# Altium PCB copper_suicide.PcbDoc (part 3 of 6)
Units mm, origin at the board's own origin, x right, y up, seen from the top; angles counter-clockwise.
Board outline 200 x 200 mm, 10 copper layers (Top Layer, Signal Layer 1, Signal Layer 2, Signal Layer 3, Signal Layer 4, Signal Layer 5, Signal Layer 6, Signal Layer 7, Signal Layer 8, Bottom Layer), stack 1.555 mm thick; 36 components, 3934 nets, 1640 pads, 0 vias.
Unrouted connection lines stored in the file: 671.
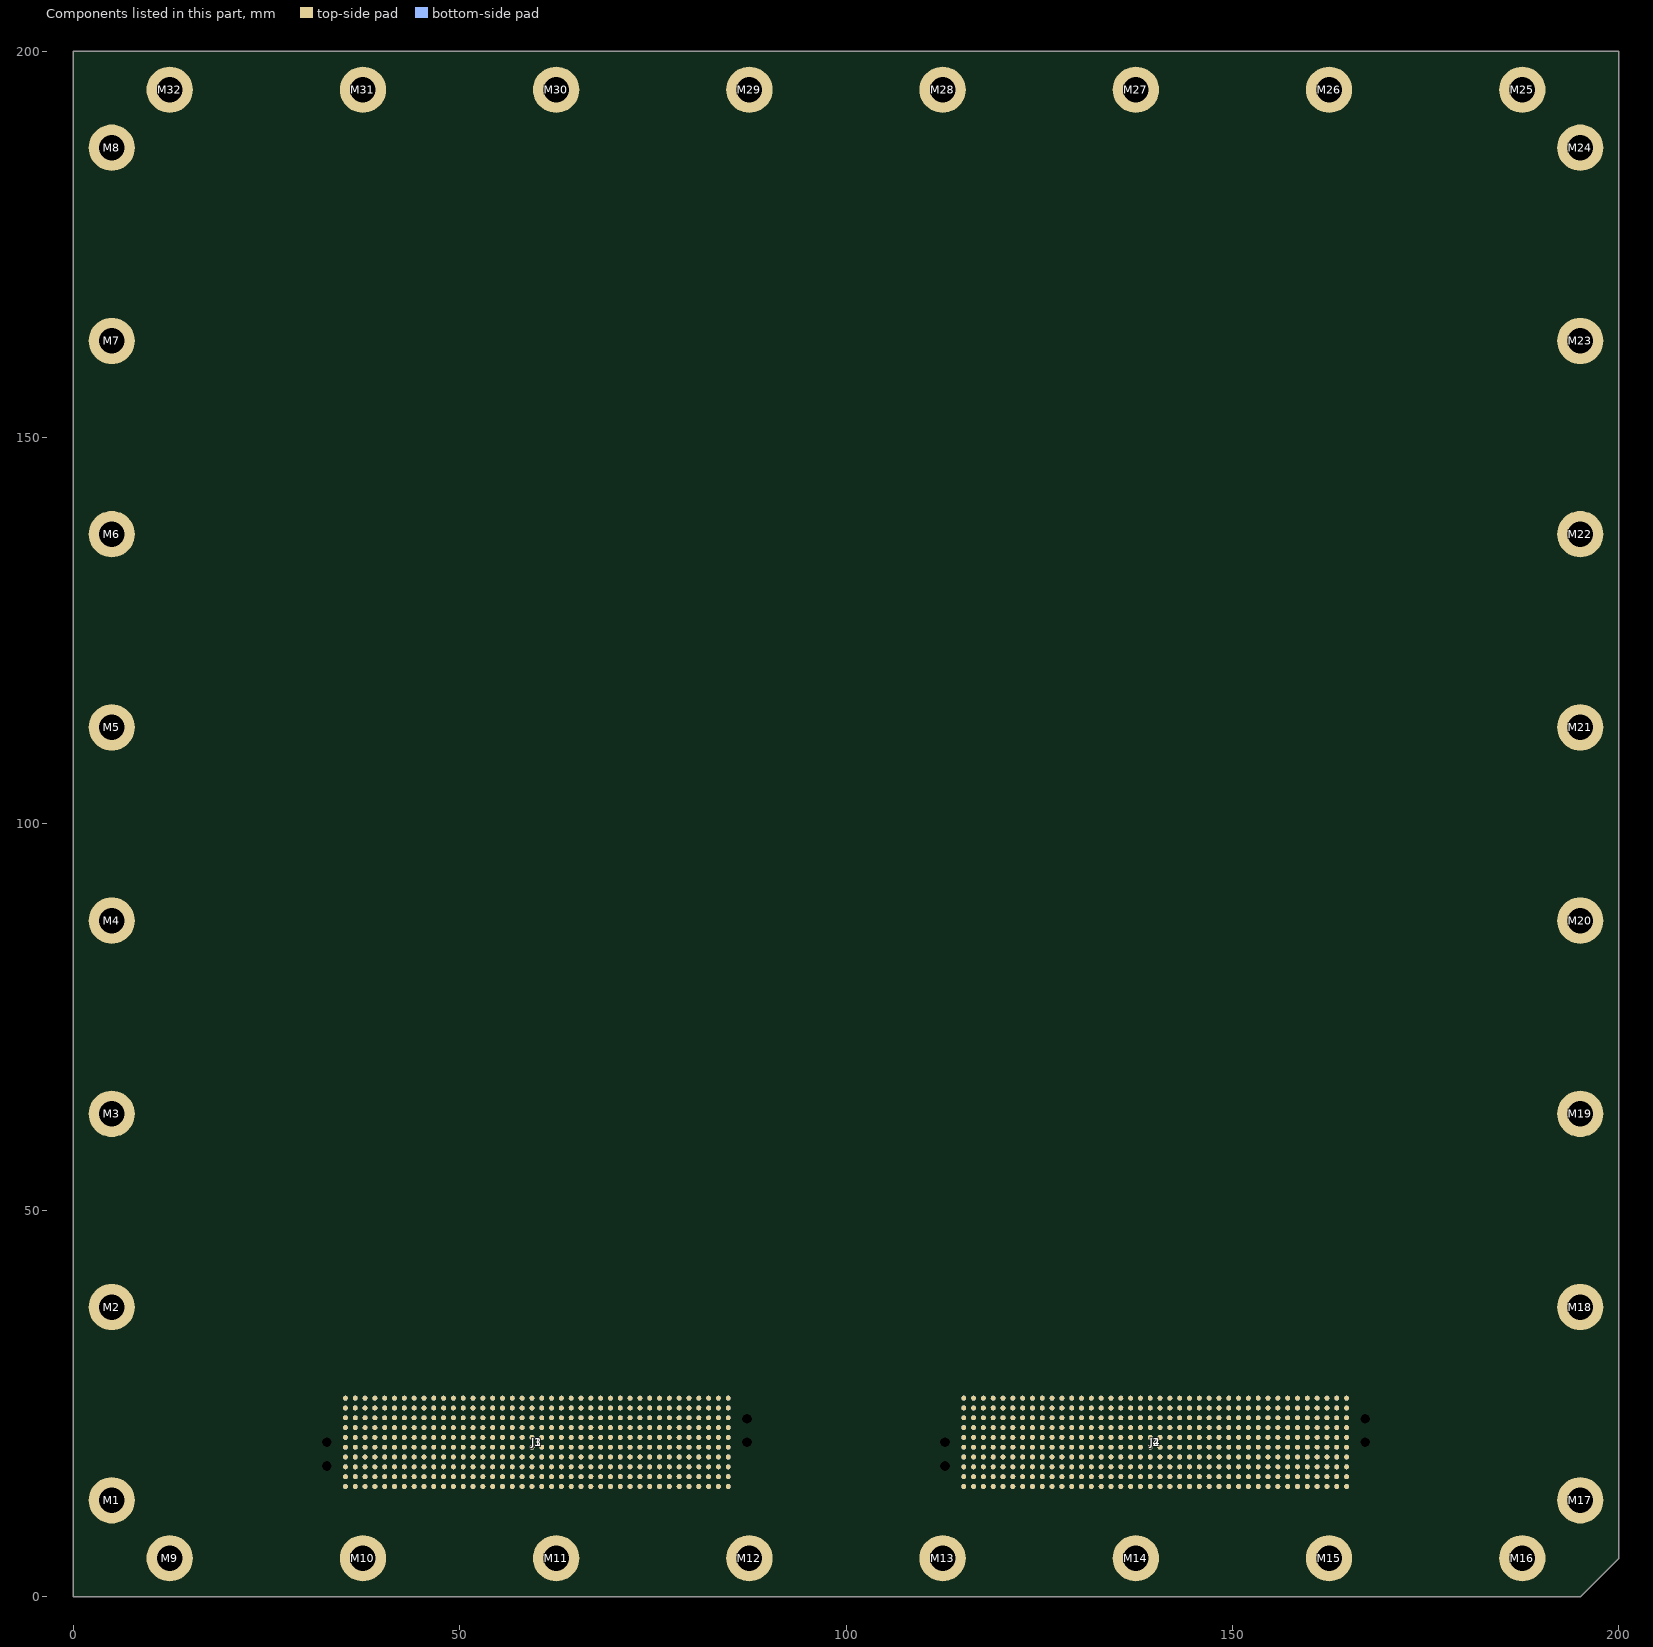
[diagram p3: the components of this part, seen from the top]

## Classes and differential pairs (continued)
net class IO07_DDRCC: IL07_00-J3A.DDRCC.S01C_5_N IL07_00-J3A.DDRCC.S01C_5_P IL07_00-J3A.DDRCC.S2_5 IL07_00-J3A.DDRCC.S3_5 IL07_00-J3A.DDRCC.S4_5 IL07_00-J3A.DDRCC.S5_5 IL07_00-J3A.DDRCC.S6_5 IL07_00-J3A.DDRCC.S7_5 IL07_00-J3A.DDRCC.S8_5 IL07_00-J3A.DDRCC.S9_5 IL07_00-J3A.DDRCC.S10_5 IL07_00-J3A.DDRCC.S11_5 IL07_00-J3A.DDRCC.S12_5 IL07_00-J3A.DDRCC.S13_5 IL07_00-J3A.DDRCC.S14_5 IL07_00-J3A.DDRCC.S15_5 IL07_00-J3A.DDRCC.S16_5 IL07_00-J3A.DDRCC.S17_5 IL07_00-J3A.DDRCC.S18_5 IL07_00-J3A.DDRCC.S19_5 IL07_00-J3A.DDRCC.S20_5 IL07_00-J3A.DDRCC.S21_5 IL07_00-J3A.DDRCC.S22_5 IL07_00-J3A.DDRCC.S23_5 IL07_00-J3A.DDRCC.S24_5 IL07_00-J3A.DDRCC.S25_5 IL07_00-J3A.DDRCC.S26_5 IL07_00-J3A.DDRCC.S27_5 IL07_00-J3A.DDRCC.S28_5 IL07_00-J3A.DDRCC.S29_5 IL07_00-J3A.DDRCC.S30_5 IL07_00-J3A.DDRCC.S31_5 IL07_00-J3A.DDRCC.S32_5 IL07_00-J3A.DDRCC.S33_5 IL07_00-J3A.DDRCC.S34_5 IL07_00-J3A.DDRCC.S35_5 IL07_00-J3A.DDRCC.S36_5 IL07_00-J3A.DDRCC.S37_5 IL07_00-J3A.DDRCC.S38_5 IL07_00-J3A.DDRCC.S39_5 IL07_00-J3A.DDRCC.S40_5 IL07_00-J3A.DDRCC.S41_5 IL07_00-J3A.DDRCC.S42_5 IL07_00-J3A.DDRCC.S43_5 IL07_00-J3A.DDRCC.S44_5 IL07_00-J3A.DDRCC.S45_5 IL07_00-J3A.DDRCC.S46_5 IL12_00-07_01.DDRCC.S01C_5_N IL12_00-07_01.DDRCC.S01C_5_P IL12_00-07_01.DDRCC.S2_5 IL12_00-07_01.DDRCC.S3_5 IL12_00-07_01.DDRCC.S4_5 IL12_00-07_01.DDRCC.S5_5 IL12_00-07_01.DDRCC.S6_5 IL12_00-07_01.DDRCC.S7_5 IL12_00-07_01.DDRCC.S8_5 IL12_00-07_01.DDRCC.S9_5 IL12_00-07_01.DDRCC.S10_5 IL12_00-07_01.DDRCC.S11_5 IL12_00-07_01.DDRCC.S12_5 IL12_00-07_01.DDRCC.S13_5 IL12_00-07_01.DDRCC.S14_5 IL12_00-07_01.DDRCC.S15_5 IL12_00-07_01.DDRCC.S16_5 IL12_00-07_01.DDRCC.S17_5 IL12_00-07_01.DDRCC.S18_5 IL12_00-07_01.DDRCC.S19_5 IL12_00-07_01.DDRCC.S20_5 IL12_00-07_01.DDRCC.S21_5 IL12_00-07_01.DDRCC.S22_5 IL12_00-07_01.DDRCC.S23_5 IL12_00-07_01.DDRCC.S24_5 IL12_00-07_01.DDRCC.S25_5 IL12_00-07_01.DDRCC.S26_5 IL12_00-07_01.DDRCC.S27_5 IL12_00-07_01.DDRCC.S28_5 IL12_00-07_01.DDRCC.S29_5 IL12_00-07_01.DDRCC.S30_5 IL12_00-07_01.DDRCC.S31_5 IL12_00-07_01.DDRCC.S32_5 IL12_00-07_01.DDRCC.S33_5 IL12_00-07_01.DDRCC.S34_5 IL12_00-07_01.DDRCC.S35_5 IL12_00-07_01.DDRCC.S36_5 IL12_00-07_01.DDRCC.S37_5 IL12_00-07_01.DDRCC.S38_5 IL12_00-07_01.DDRCC.S39_5 IL12_00-07_01.DDRCC.S40_5 IL12_00-07_01.DDRCC.S41_5 IL12_00-07_01.DDRCC.S42_5 IL12_00-07_01.DDRCC.S43_5 IL12_00-07_01.DDRCC.S44_5 IL12_00-07_01.DDRCC.S45_5 IL12_00-07_01.DDRCC.S46_5 IL12_01-07_02.DDRCC.S01C_5_N IL12_01-07_02.DDRCC.S01C_5_P IL12_01-07_02.DDRCC.S2_5 IL12_01-07_02.DDRCC.S3_5 IL12_01-07_02.DDRCC.S4_5 IL12_01-07_02.DDRCC.S5_5 IL12_01-07_02.DDRCC.S6_5 IL12_01-07_02.DDRCC.S7_5 IL12_01-07_02.DDRCC.S8_5 IL12_01-07_02.DDRCC.S9_5 IL12_01-07_02.DDRCC.S10_5 IL12_01-07_02.DDRCC.S11_5 IL12_01-07_02.DDRCC.S12_5 IL12_01-07_02.DDRCC.S13_5 IL12_01-07_02.DDRCC.S14_5 IL12_01-07_02.DDRCC.S15_5 IL12_01-07_02.DDRCC.S16_5 IL12_01-07_02.DDRCC.S17_5 IL12_01-07_02.DDRCC.S18_5 IL12_01-07_02.DDRCC.S19_5 IL12_01-07_02.DDRCC.S20_5 IL12_01-07_02.DDRCC.S21_5 IL12_01-07_02.DDRCC.S22_5 IL12_01-07_02.DDRCC.S23_5 IL12_01-07_02.DDRCC.S24_5 IL12_01-07_02.DDRCC.S25_5 IL12_01-07_02.DDRCC.S26_5 IL12_01-07_02.DDRCC.S27_5 IL12_01-07_02.DDRCC.S28_5 IL12_01-07_02.DDRCC.S29_5 IL12_01-07_02.DDRCC.S30_5 IL12_01-07_02.DDRCC.S31_5 IL12_01-07_02.DDRCC.S32_5 IL12_01-07_02.DDRCC.S33_5 IL12_01-07_02.DDRCC.S34_5 IL12_01-07_02.DDRCC.S35_5 IL12_01-07_02.DDRCC.S36_5 IL12_01-07_02.DDRCC.S37_5 IL12_01-07_02.DDRCC.S38_5 IL12_01-07_02.DDRCC.S39_5 IL12_01-07_02.DDRCC.S40_5 IL12_01-07_02.DDRCC.S41_5 IL12_01-07_02.DDRCC.S42_5 IL12_01-07_02.DDRCC.S43_5 IL12_01-07_02.DDRCC.S44_5 IL12_01-07_02.DDRCC.S45_5 IL12_01-07_02.DDRCC.S46_5 IL12_02-07_03.DDRCC.S01C_5_N IL12_02-07_03.DDRCC.S01C_5_P IL12_02-07_03.DDRCC.S2_5 IL12_02-07_03.DDRCC.S3_5 IL12_02-07_03.DDRCC.S4_5 IL12_02-07_03.DDRCC.S5_5 IL12_02-07_03.DDRCC.S6_5 IL12_02-07_03.DDRCC.S7_5 IL12_02-07_03.DDRCC.S8_5 IL12_02-07_03.DDRCC.S9_5 IL12_02-07_03.DDRCC.S10_5 IL12_02-07_03.DDRCC.S11_5 IL12_02-07_03.DDRCC.S12_5 IL12_02-07_03.DDRCC.S13_5 IL12_02-07_03.DDRCC.S14_5 IL12_02-07_03.DDRCC.S15_5 IL12_02-07_03.DDRCC.S16_5 IL12_02-07_03.DDRCC.S17_5 IL12_02-07_03.DDRCC.S18_5 IL12_02-07_03.DDRCC.S19_5 IL12_02-07_03.DDRCC.S20_5 IL12_02-07_03.DDRCC.S21_5 IL12_02-07_03.DDRCC.S22_5 IL12_02-07_03.DDRCC.S23_5 IL12_02-07_03.DDRCC.S24_5 IL12_02-07_03.DDRCC.S25_5 IL12_02-07_03.DDRCC.S26_5 IL12_02-07_03.DDRCC.S27_5 IL12_02-07_03.DDRCC.S28_5 IL12_02-07_03.DDRCC.S29_5 IL12_02-07_03.DDRCC.S30_5 IL12_02-07_03.DDRCC.S31_5 IL12_02-07_03.DDRCC.S32_5 IL12_02-07_03.DDRCC.S33_5 IL12_02-07_03.DDRCC.S34_5 IL12_02-07_03.DDRCC.S35_5 IL12_02-07_03.DDRCC.S36_5 IL12_02-07_03.DDRCC.S37_5 IL12_02-07_03.DDRCC.S38_5 IL12_02-07_03.DDRCC.S39_5 IL12_02-07_03.DDRCC.S40_5 IL12_02-07_03.DDRCC.S41_5 IL12_02-07_03.DDRCC.S42_5 IL12_02-07_03.DDRCC.S43_5 IL12_02-07_03.DDRCC.S44_5 IL12_02-07_03.DDRCC.S45_5 IL12_02-07_03.DDRCC.S46_5 IL34_10-07_20.DDRCC.S01C_5_N IL34_10-07_20.DDRCC.S01C_5_P IL34_10-07_20.DDRCC.S2_5 IL34_10-07_20.DDRCC.S3_5 IL34_10-07_20.DDRCC.S4_5 IL34_10-07_20.DDRCC.S5_5 IL34_10-07_20.DDRCC.S6_5 IL34_10-07_20.DDRCC.S7_5 IL34_10-07_20.DDRCC.S8_5 IL34_10-07_20.DDRCC.S9_5 IL34_10-07_20.DDRCC.S10_5 IL34_10-07_20.DDRCC.S11_5 IL34_10-07_20.DDRCC.S12_5 IL34_10-07_20.DDRCC.S13_5 IL34_10-07_20.DDRCC.S14_5 IL34_10-07_20.DDRCC.S15_5 IL34_10-07_20.DDRCC.S16_5 IL34_10-07_20.DDRCC.S17_5 IL34_10-07_20.DDRCC.S18_5 IL34_10-07_20.DDRCC.S19_5 IL34_10-07_20.DDRCC.S20_5 IL34_10-07_20.DDRCC.S21_5 IL34_10-07_20.DDRCC.S22_5 IL34_10-07_20.DDRCC.S23_5 IL34_10-07_20.DDRCC.S24_5 IL34_10-07_20.DDRCC.S25_5 IL34_10-07_20.DDRCC.S26_5 IL34_10-07_20.DDRCC.S27_5 IL34_10-07_20.DDRCC.S28_5 IL34_10-07_20.DDRCC.S29_5 IL34_10-07_20.DDRCC.S30_5 IL34_10-07_20.DDRCC.S31_5 IL34_10-07_20.DDRCC.S32_5 IL34_10-07_20.DDRCC.S33_5 IL34_10-07_20.DDRCC.S34_5 IL34_10-07_20.DDRCC.S35_5 IL34_10-07_20.DDRCC.S36_5 IL34_10-07_20.DDRCC.S37_5 IL34_10-07_20.DDRCC.S38_5 IL34_10-07_20.DDRCC.S39_5 IL34_10-07_20.DDRCC.S40_5 IL34_10-07_20.DDRCC.S41_5 IL34_10-07_20.DDRCC.S42_5 IL34_10-07_20.DDRCC.S43_5 IL34_10-07_20.DDRCC.S44_5 IL34_10-07_20.DDRCC.S45_5 IL34_10-07_20.DDRCC.S46_5 IL34_11-07_21.DDRCC.S01C_5_N IL34_11-07_21.DDRCC.S01C_5_P IL34_11-07_21.DDRCC.S2_5 IL34_11-07_21.DDRCC.S3_5 IL34_11-07_21.DDRCC.S4_5 IL34_11-07_21.DDRCC.S5_5 IL34_11-07_21.DDRCC.S6_5 IL34_11-07_21.DDRCC.S7_5 IL34_11-07_21.DDRCC.S8_5 IL34_11-07_21.DDRCC.S9_5 IL34_11-07_21.DDRCC.S10_5 IL34_11-07_21.DDRCC.S11_5 IL34_11-07_21.DDRCC.S12_5 IL34_11-07_21.DDRCC.S13_5 IL34_11-07_21.DDRCC.S14_5 IL34_11-07_21.DDRCC.S15_5 IL34_11-07_21.DDRCC.S16_5 IL34_11-07_21.DDRCC.S17_5 IL34_11-07_21.DDRCC.S18_5 IL34_11-07_21.DDRCC.S19_5 IL34_11-07_21.DDRCC.S20_5 IL34_11-07_21.DDRCC.S21_5 IL34_11-07_21.DDRCC.S22_5 IL34_11-07_21.DDRCC.S23_5 IL34_11-07_21.DDRCC.S24_5 IL34_11-07_21.DDRCC.S25_5 IL34_11-07_21.DDRCC.S26_5 IL34_11-07_21.DDRCC.S27_5 IL34_11-07_21.DDRCC.S28_5 IL34_11-07_21.DDRCC.S29_5 IL34_11-07_21.DDRCC.S30_5 IL34_11-07_21.DDRCC.S31_5 IL34_11-07_21.DDRCC.S32_5 IL34_11-07_21.DDRCC.S33_5 IL34_11-07_21.DDRCC.S34_5 IL34_11-07_21.DDRCC.S35_5 IL34_11-07_21.DDRCC.S36_5 IL34_11-07_21.DDRCC.S37_5 IL34_11-07_21.DDRCC.S38_5 IL34_11-07_21.DDRCC.S39_5 IL34_11-07_21.DDRCC.S40_5 IL34_11-07_21.DDRCC.S41_5 IL34_11-07_21.DDRCC.S42_5 IL34_11-07_21.DDRCC.S43_5 IL34_11-07_21.DDRCC.S44_5 IL34_11-07_21.DDRCC.S45_5 IL34_11-07_21.DDRCC.S46_5 IL34_12-07_22.DDRCC.S01C_5_N IL34_12-07_22.DDRCC.S01C_5_P IL34_12-07_22.DDRCC.S2_5 IL34_12-07_22.DDRCC.S3_5 IL34_12-07_22.DDRCC.S4_5 IL34_12-07_22.DDRCC.S5_5 IL34_12-07_22.DDRCC.S6_5 IL34_12-07_22.DDRCC.S7_5 IL34_12-07_22.DDRCC.S8_5 IL34_12-07_22.DDRCC.S9_5 IL34_12-07_22.DDRCC.S10_5 IL34_12-07_22.DDRCC.S11_5 IL34_12-07_22.DDRCC.S12_5 IL34_12-07_22.DDRCC.S13_5 IL34_12-07_22.DDRCC.S14_5 IL34_12-07_22.DDRCC.S15_5 IL34_12-07_22.DDRCC.S16_5 IL34_12-07_22.DDRCC.S17_5 IL34_12-07_22.DDRCC.S18_5 IL34_12-07_22.DDRCC.S19_5 IL34_12-07_22.DDRCC.S20_5 IL34_12-07_22.DDRCC.S21_5 IL34_12-07_22.DDRCC.S22_5 IL34_12-07_22.DDRCC.S23_5 IL34_12-07_22.DDRCC.S24_5 IL34_12-07_22.DDRCC.S25_5 IL34_12-07_22.DDRCC.S26_5 IL34_12-07_22.DDRCC.S27_5 IL34_12-07_22.DDRCC.S28_5 IL34_12-07_22.DDRCC.S29_5 IL34_12-07_22.DDRCC.S30_5 IL34_12-07_22.DDRCC.S31_5 IL34_12-07_22.DDRCC.S32_5 IL34_12-07_22.DDRCC.S33_5 IL34_12-07_22.DDRCC.S34_5 IL34_12-07_22.DDRCC.S35_5 IL34_12-07_22.DDRCC.S36_5 IL34_12-07_22.DDRCC.S37_5 IL34_12-07_22.DDRCC.S38_5 IL34_12-07_22.DDRCC.S39_5 IL34_12-07_22.DDRCC.S40_5 IL34_12-07_22.DDRCC.S41_5 IL34_12-07_22.DDRCC.S42_5 IL34_12-07_22.DDRCC.S43_5 IL34_12-07_22.DDRCC.S44_5 IL34_12-07_22.DDRCC.S45_5 IL34_12-07_22.DDRCC.S46_5 IL34_13-07_23.DDRCC.S01C_5_N IL34_13-07_23.DDRCC.S01C_5_P IL34_13-07_23.DDRCC.S2_5 IL34_13-07_23.DDRCC.S3_5 IL34_13-07_23.DDRCC.S4_5 IL34_13-07_23.DDRCC.S5_5 IL34_13-07_23.DDRCC.S6_5 IL34_13-07_23.DDRCC.S7_5 IL34_13-07_23.DDRCC.S8_5 IL34_13-07_23.DDRCC.S9_5 IL34_13-07_23.DDRCC.S10_5 IL34_13-07_23.DDRCC.S11_5 IL34_13-07_23.DDRCC.S12_5 IL34_13-07_23.DDRCC.S13_5 IL34_13-07_23.DDRCC.S14_5 IL34_13-07_23.DDRCC.S15_5 IL34_13-07_23.DDRCC.S16_5 IL34_13-07_23.DDRCC.S17_5 IL34_13-07_23.DDRCC.S18_5 IL34_13-07_23.DDRCC.S19_5 IL34_13-07_23.DDRCC.S20_5 IL34_13-07_23.DDRCC.S21_5 IL34_13-07_23.DDRCC.S22_5 IL34_13-07_23.DDRCC.S23_5 IL34_13-07_23.DDRCC.S24_5 IL34_13-07_23.DDRCC.S25_5 IL34_13-07_23.DDRCC.S26_5 IL34_13-07_23.DDRCC.S27_5 IL34_13-07_23.DDRCC.S28_5 IL34_13-07_23.DDRCC.S29_5 IL34_13-07_23.DDRCC.S30_5 IL34_13-07_23.DDRCC.S31_5 IL34_13-07_23.DDRCC.S32_5 IL34_13-07_23.DDRCC.S33_5 IL34_13-07_23.DDRCC.S34_5 IL34_13-07_23.DDRCC.S35_5 IL34_13-07_23.DDRCC.S36_5 IL34_13-07_23.DDRCC.S37_5 IL34_13-07_23.DDRCC.S38_5 IL34_13-07_23.DDRCC.S39_5 IL34_13-07_23.DDRCC.S40_5 IL34_13-07_23.DDRCC.S41_5 IL34_13-07_23.DDRCC.S42_5 IL34_13-07_23.DDRCC.S43_5 IL34_13-07_23.DDRCC.S44_5 IL34_13-07_23.DDRCC.S45_5 IL34_13-07_23.DDRCC.S46_5 IL34_20-07_30.DDRCC.S01C_5_N IL34_20-07_30.DDRCC.S01C_5_P IL34_20-07_30.DDRCC.S2_5 IL34_20-07_30.DDRCC.S3_5 IL34_20-07_30.DDRCC.S4_5 IL34_20-07_30.DDRCC.S5_5 IL34_20-07_30.DDRCC.S6_5 IL34_20-07_30.DDRCC.S7_5 IL34_20-07_30.DDRCC.S8_5 IL34_20-07_30.DDRCC.S9_5 IL34_20-07_30.DDRCC.S10_5 IL34_20-07_30.DDRCC.S11_5 IL34_20-07_30.DDRCC.S12_5 IL34_20-07_30.DDRCC.S13_5 IL34_20-07_30.DDRCC.S14_5 IL34_20-07_30.DDRCC.S15_5 IL34_20-07_30.DDRCC.S16_5 IL34_20-07_30.DDRCC.S17_5 IL34_20-07_30.DDRCC.S18_5 IL34_20-07_30.DDRCC.S19_5 IL34_20-07_30.DDRCC.S20_5 IL34_20-07_30.DDRCC.S21_5 IL34_20-07_30.DDRCC.S22_5 IL34_20-07_30.DDRCC.S23_5 IL34_20-07_30.DDRCC.S24_5 IL34_20-07_30.DDRCC.S25_5 IL34_20-07_30.DDRCC.S26_5 IL34_20-07_30.DDRCC.S27_5 IL34_20-07_30.DDRCC.S28_5 IL34_20-07_30.DDRCC.S29_5 IL34_20-07_30.DDRCC.S30_5 IL34_20-07_30.DDRCC.S31_5 IL34_20-07_30.DDRCC.S32_5 IL34_20-07_30.DDRCC.S33_5 IL34_20-07_30.DDRCC.S34_5 IL34_20-07_30.DDRCC.S35_5 IL34_20-07_30.DDRCC.S36_5 IL34_20-07_30.DDRCC.S37_5 IL34_20-07_30.DDRCC.S38_5 IL34_20-07_30.DDRCC.S39_5 IL34_20-07_30.DDRCC.S40_5 IL34_20-07_30.DDRCC.S41_5 IL34_20-07_30.DDRCC.S42_5 IL34_20-07_30.DDRCC.S43_5 IL34_20-07_30.DDRCC.S44_5 IL34_20-07_30.DDRCC.S45_5 IL34_20-07_30.DDRCC.S46_5 IL34_21-07_31.DDRCC.S01C_5_N IL34_21-07_31.DDRCC.S01C_5_P IL34_21-07_31.DDRCC.S2_5 IL34_21-07_31.DDRCC.S3_5 IL34_21-07_31.DDRCC.S4_5 IL34_21-07_31.DDRCC.S5_5 IL34_21-07_31.DDRCC.S6_5 IL34_21-07_31.DDRCC.S7_5 IL34_21-07_31.DDRCC.S8_5 IL34_21-07_31.DDRCC.S9_5 IL34_21-07_31.DDRCC.S10_5 IL34_21-07_31.DDRCC.S11_5 IL34_21-07_31.DDRCC.S12_5 IL34_21-07_31.DDRCC.S13_5 IL34_21-07_31.DDRCC.S14_5 IL34_21-07_31.DDRCC.S15_5 IL34_21-07_31.DDRCC.S16_5 IL34_21-07_31.DDRCC.S17_5 IL34_21-07_31.DDRCC.S18_5 IL34_21-07_31.DDRCC.S19_5 IL34_21-07_31.DDRCC.S20_5 IL34_21-07_31.DDRCC.S21_5 IL34_21-07_31.DDRCC.S22_5 IL34_21-07_31.DDRCC.S23_5 IL34_21-07_31.DDRCC.S24_5 IL34_21-07_31.DDRCC.S25_5 IL34_21-07_31.DDRCC.S26_5 IL34_21-07_31.DDRCC.S27_5 IL34_21-07_31.DDRCC.S28_5 IL34_21-07_31.DDRCC.S29_5 IL34_21-07_31.DDRCC.S30_5 IL34_21-07_31.DDRCC.S31_5 IL34_21-07_31.DDRCC.S32_5 IL34_21-07_31.DDRCC.S33_5 IL34_21-07_31.DDRCC.S34_5 IL34_21-07_31.DDRCC.S35_5 IL34_21-07_31.DDRCC.S36_5 IL34_21-07_31.DDRCC.S37_5 IL34_21-07_31.DDRCC.S38_5 IL34_21-07_31.DDRCC.S39_5 IL34_21-07_31.DDRCC.S40_5 IL34_21-07_31.DDRCC.S41_5 IL34_21-07_31.DDRCC.S42_5 IL34_21-07_31.DDRCC.S43_5 IL34_21-07_31.DDRCC.S44_5 IL34_21-07_31.DDRCC.S45_5 IL34_21-07_31.DDRCC.S46_5 IL34_22-07_32.DDRCC.S01C_5_N IL34_22-07_32.DDRCC.S01C_5_P IL34_22-07_32.DDRCC.S2_5 IL34_22-07_32.DDRCC.S3_5 IL34_22-07_32.DDRCC.S4_5 IL34_22-07_32.DDRCC.S5_5 IL34_22-07_32.DDRCC.S6_5 IL34_22-07_32.DDRCC.S7_5 IL34_22-07_32.DDRCC.S8_5 IL34_22-07_32.DDRCC.S9_5 IL34_22-07_32.DDRCC.S10_5 IL34_22-07_32.DDRCC.S11_5 IL34_22-07_32.DDRCC.S12_5 IL34_22-07_32.DDRCC.S13_5 IL34_22-07_32.DDRCC.S14_5 IL34_22-07_32.DDRCC.S15_5 IL34_22-07_32.DDRCC.S16_5 IL34_22-07_32.DDRCC.S17_5 IL34_22-07_32.DDRCC.S18_5 IL34_22-07_32.DDRCC.S19_5 IL34_22-07_32.DDRCC.S20_5 IL34_22-07_32.DDRCC.S21_5 IL34_22-07_32.DDRCC.S22_5 IL34_22-07_32.DDRCC.S23_5 IL34_22-07_32.DDRCC.S24_5 IL34_22-07_32.DDRCC.S25_5 IL34_22-07_32.DDRCC.S26_5 IL34_22-07_32.DDRCC.S27_5 IL34_22-07_32.DDRCC.S28_5 IL34_22-07_32.DDRCC.S29_5 IL34_22-07_32.DDRCC.S30_5 IL34_22-07_32.DDRCC.S31_5 IL34_22-07_32.DDRCC.S32_5 IL34_22-07_32.DDRCC.S33_5 IL34_22-07_32.DDRCC.S34_5 IL34_22-07_32.DDRCC.S35_5 IL34_22-07_32.DDRCC.S36_5 IL34_22-07_32.DDRCC.S37_5 IL34_22-07_32.DDRCC.S38_5 IL34_22-07_32.DDRCC.S39_5 IL34_22-07_32.DDRCC.S40_5 IL34_22-07_32.DDRCC.S41_5 IL34_22-07_32.DDRCC.S42_5 IL34_22-07_32.DDRCC.S43_5 IL34_22-07_32.DDRCC.S44_5 IL34_22-07_32.DDRCC.S45_5 IL34_22-07_32.DDRCC.S46_5 IL34_23-07_33.DDRCC.S01C_5_N IL34_23-07_33.DDRCC.S01C_5_P IL34_23-07_33.DDRCC.S2_5 IL34_23-07_33.DDRCC.S3_5 IL34_23-07_33.DDRCC.S4_5 IL34_23-07_33.DDRCC.S5_5 IL34_23-07_33.DDRCC.S6_5 IL34_23-07_33.DDRCC.S7_5 IL34_23-07_33.DDRCC.S8_5 IL34_23-07_33.DDRCC.S9_5 IL34_23-07_33.DDRCC.S10_5 IL34_23-07_33.DDRCC.S11_5 IL34_23-07_33.DDRCC.S12_5 IL34_23-07_33.DDRCC.S13_5 IL34_23-07_33.DDRCC.S14_5 IL34_23-07_33.DDRCC.S15_5 IL34_23-07_33.DDRCC.S16_5 IL34_23-07_33.DDRCC.S17_5 IL34_23-07_33.DDRCC.S18_5 IL34_23-07_33.DDRCC.S19_5 IL34_23-07_33.DDRCC.S20_5 IL34_23-07_33.DDRCC.S21_5 IL34_23-07_33.DDRCC.S22_5 IL34_23-07_33.DDRCC.S23_5 IL34_23-07_33.DDRCC.S24_5 IL34_23-07_33.DDRCC.S25_5 IL34_23-07_33.DDRCC.S26_5 IL34_23-07_33.DDRCC.S27_5 IL34_23-07_33.DDRCC.S28_5 IL34_23-07_33.DDRCC.S29_5 IL34_23-07_33.DDRCC.S30_5 IL34_23-07_33.DDRCC.S31_5 IL34_23-07_33.DDRCC.S32_5 IL34_23-07_33.DDRCC.S33_5 IL34_23-07_33.DDRCC.S34_5 IL34_23-07_33.DDRCC.S35_5 IL34_23-07_33.DDRCC.S36_5 IL34_23-07_33.DDRCC.S37_5 IL34_23-07_33.DDRCC.S38_5 IL34_23-07_33.DDRCC.S39_5 IL34_23-07_33.DDRCC.S40_5 IL34_23-07_33.DDRCC.S41_5 IL34_23-07_33.DDRCC.S42_5 IL34_23-07_33.DDRCC.S43_5 IL34_23-07_33.DDRCC.S44_5 IL34_23-07_33.DDRCC.S45_5 IL34_23-07_33.DDRCC.S46_5 IL68_00-07_10.DDRCC.S01C_5_N IL68_00-07_10.DDRCC.S01C_5_P IL68_00-07_10.DDRCC.S2_5 IL68_00-07_10.DDRCC.S3_5 IL68_00-07_10.DDRCC.S4_5 IL68_00-07_10.DDRCC.S5_5 IL68_00-07_10.DDRCC.S6_5 IL68_00-07_10.DDRCC.S7_5 IL68_00-07_10.DDRCC.S8_5 IL68_00-07_10.DDRCC.S9_5 IL68_00-07_10.DDRCC.S10_5 IL68_00-07_10.DDRCC.S11_5 IL68_00-07_10.DDRCC.S12_5 IL68_00-07_10.DDRCC.S13_5 IL68_00-07_10.DDRCC.S14_5 IL68_00-07_10.DDRCC.S15_5 IL68_00-07_10.DDRCC.S16_5 IL68_00-07_10.DDRCC.S17_5 IL68_00-07_10.DDRCC.S18_5 IL68_00-07_10.DDRCC.S19_5 IL68_00-07_10.DDRCC.S20_5 IL68_00-07_10.DDRCC.S21_5 IL68_00-07_10.DDRCC.S22_5 IL68_00-07_10.DDRCC.S23_5 IL68_00-07_10.DDRCC.S24_5 IL68_00-07_10.DDRCC.S25_5 IL68_00-07_10.DDRCC.S26_5 IL68_00-07_10.DDRCC.S27_5 IL68_00-07_10.DDRCC.S28_5 IL68_00-07_10.DDRCC.S29_5 IL68_00-07_10.DDRCC.S30_5 IL68_00-07_10.DDRCC.S31_5 IL68_00-07_10.DDRCC.S32_5 IL68_00-07_10.DDRCC.S33_5 IL68_00-07_10.DDRCC.S34_5 IL68_00-07_10.DDRCC.S35_5 IL68_00-07_10.DDRCC.S36_5 IL68_00-07_10.DDRCC.S37_5 IL68_00-07_10.DDRCC.S38_5 IL68_00-07_10.DDRCC.S39_5 IL68_00-07_10.DDRCC.S40_5 IL68_00-07_10.DDRCC.S41_5 IL68_00-07_10.DDRCC.S42_5 IL68_00-07_10.DDRCC.S43_5 IL68_00-07_10.DDRCC.S44_5 IL68_00-07_10.DDRCC.S45_5 IL68_00-07_10.DDRCC.S46_5 IL68_01-07_11.DDRCC.S01C_5_N IL68_01-07_11.DDRCC.S01C_5_P IL68_01-07_11.DDRCC.S2_5 IL68_01-07_11.DDRCC.S3_5 IL68_01-07_11.DDRCC.S4_5 IL68_01-07_11.DDRCC.S5_5 IL68_01-07_11.DDRCC.S6_5 IL68_01-07_11.DDRCC.S7_5 IL68_01-07_11.DDRCC.S8_5 IL68_01-07_11.DDRCC.S9_5 IL68_01-07_11.DDRCC.S10_5 IL68_01-07_11.DDRCC.S11_5 IL68_01-07_11.DDRCC.S12_5 IL68_01-07_11.DDRCC.S13_5 IL68_01-07_11.DDRCC.S14_5 IL68_01-07_11.DDRCC.S15_5 IL68_01-07_11.DDRCC.S16_5 IL68_01-07_11.DDRCC.S17_5 IL68_01-07_11.DDRCC.S18_5 IL68_01-07_11.DDRCC.S19_5 IL68_01-07_11.DDRCC.S20_5 IL68_01-07_11.DDRCC.S21_5 IL68_01-07_11.DDRCC.S22_5 IL68_01-07_11.DDRCC.S23_5 IL68_01-07_11.DDRCC.S24_5 IL68_01-07_11.DDRCC.S25_5 IL68_01-07_11.DDRCC.S26_5 IL68_01-07_11.DDRCC.S27_5 IL68_01-07_11.DDRCC.S28_5 IL68_01-07_11.DDRCC.S29_5 IL68_01-07_11.DDRCC.S30_5 IL68_01-07_11.DDRCC.S31_5 IL68_01-07_11.DDRCC.S32_5 IL68_01-07_11.DDRCC.S33_5 IL68_01-07_11.DDRCC.S34_5 IL68_01-07_11.DDRCC.S35_5 IL68_01-07_11.DDRCC.S36_5 IL68_01-07_11.DDRCC.S37_5 IL68_01-07_11.DDRCC.S38_5 IL68_01-07_11.DDRCC.S39_5 IL68_01-07_11.DDRCC.S40_5 IL68_01-07_11.DDRCC.S41_5 IL68_01-07_11.DDRCC.S42_5 IL68_01-07_11.DDRCC.S43_5 IL68_01-07_11.DDRCC.S44_5 IL68_01-07_11.DDRCC.S45_5 IL68_01-07_11.DDRCC.S46_5 IL68_02-07_12.DDRCC.S01C_5_N IL68_02-07_12.DDRCC.S01C_5_P IL68_02-07_12.DDRCC.S2_5 IL68_02-07_12.DDRCC.S3_5 IL68_02-07_12.DDRCC.S4_5 IL68_02-07_12.DDRCC.S5_5 IL68_02-07_12.DDRCC.S6_5 IL68_02-07_12.DDRCC.S7_5 IL68_02-07_12.DDRCC.S8_5 IL68_02-07_12.DDRCC.S9_5 IL68_02-07_12.DDRCC.S10_5 IL68_02-07_12.DDRCC.S11_5 IL68_02-07_12.DDRCC.S12_5 IL68_02-07_12.DDRCC.S13_5 IL68_02-07_12.DDRCC.S14_5 IL68_02-07_12.DDRCC.S15_5 IL68_02-07_12.DDRCC.S16_5 IL68_02-07_12.DDRCC.S17_5 IL68_02-07_12.DDRCC.S18_5 IL68_02-07_12.DDRCC.S19_5 IL68_02-07_12.DDRCC.S20_5 IL68_02-07_12.DDRCC.S21_5 IL68_02-07_12.DDRCC.S22_5 IL68_02-07_12.DDRCC.S23_5 IL68_02-07_12.DDRCC.S24_5 IL68_02-07_12.DDRCC.S25_5 IL68_02-07_12.DDRCC.S26_5 IL68_02-07_12.DDRCC.S27_5 IL68_02-07_12.DDRCC.S28_5 IL68_02-07_12.DDRCC.S29_5 IL68_02-07_12.DDRCC.S30_5 IL68_02-07_12.DDRCC.S31_5 IL68_02-07_12.DDRCC.S32_5 IL68_02-07_12.DDRCC.S33_5 IL68_02-07_12.DDRCC.S34_5 IL68_02-07_12.DDRCC.S35_5 IL68_02-07_12.DDRCC.S36_5 IL68_02-07_12.DDRCC.S37_5 IL68_02-07_12.DDRCC.S38_5 IL68_02-07_12.DDRCC.S39_5 IL68_02-07_12.DDRCC.S40_5 IL68_02-07_12.DDRCC.S41_5 IL68_02-07_12.DDRCC.S42_5 IL68_02-07_12.DDRCC.S43_5 IL68_02-07_12.DDRCC.S44_5 IL68_02-07_12.DDRCC.S45_5 IL68_02-07_12.DDRCC.S46_5 IL68_03-07_13.DDRCC.S01C_5_N IL68_03-07_13.DDRCC.S01C_5_P IL68_03-07_13.DDRCC.S2_5 IL68_03-07_13.DDRCC.S3_5 IL68_03-07_13.DDRCC.S4_5 IL68_03-07_13.DDRCC.S5_5 IL68_03-07_13.DDRCC.S6_5 IL68_03-07_13.DDRCC.S7_5 IL68_03-07_13.DDRCC.S8_5 IL68_03-07_13.DDRCC.S9_5 IL68_03-07_13.DDRCC.S10_5 IL68_03-07_13.DDRCC.S11_5 IL68_03-07_13.DDRCC.S12_5 IL68_03-07_13.DDRCC.S13_5 IL68_03-07_13.DDRCC.S14_5 IL68_03-07_13.DDRCC.S15_5 IL68_03-07_13.DDRCC.S16_5 IL68_03-07_13.DDRCC.S17_5 IL68_03-07_13.DDRCC.S18_5 IL68_03-07_13.DDRCC.S19_5 IL68_03-07_13.DDRCC.S20_5 IL68_03-07_13.DDRCC.S21_5 IL68_03-07_13.DDRCC.S22_5 IL68_03-07_13.DDRCC.S23_5 IL68_03-07_13.DDRCC.S24_5 IL68_03-07_13.DDRCC.S25_5 IL68_03-07_13.DDRCC.S26_5 IL68_03-07_13.DDRCC.S27_5 IL68_03-07_13.DDRCC.S28_5 IL68_03-07_13.DDRCC.S29_5 IL68_03-07_13.DDRCC.S30_5 IL68_03-07_13.DDRCC.S31_5 IL68_03-07_13.DDRCC.S32_5 IL68_03-07_13.DDRCC.S33_5 IL68_03-07_13.DDRCC.S34_5 IL68_03-07_13.DDRCC.S35_5 IL68_03-07_13.DDRCC.S36_5 IL68_03-07_13.DDRCC.S37_5 IL68_03-07_13.DDRCC.S38_5 IL68_03-07_13.DDRCC.S39_5 IL68_03-07_13.DDRCC.S40_5 IL68_03-07_13.DDRCC.S41_5 IL68_03-07_13.DDRCC.S42_5 IL68_03-07_13.DDRCC.S43_5 IL68_03-07_13.DDRCC.S44_5 IL68_03-07_13.DDRCC.S45_5 IL68_03-07_13.DDRCC.S46_5
net class JTAG_00-01: JTAG_00-01.TCK_5 JTAG_00-01.TDI_5 JTAG_00-01.TDO_5 JTAG_00-01.TMS_5
net class JTAG_01-02: JTAG_00-01.TCK_5 JTAG_00-01.TDO_5 JTAG_00-01.TMS_5 JTAG_01-02.TDI_5
net class JTAG_02-03: JTAG_00-01.TCK_5 JTAG_00-01.TDO_5 JTAG_00-01.TMS_5 JTAG_02-03.TDI_5
net class JTAG_03-BUF: JTAG_00-01.TCK_5 JTAG_00-01.TDO_5 JTAG_00-01.TMS_5 JTAG_03-BUF.TDI_5
net class JTAG_10-11: JTAG_00-01.TDO_5 JTAG_10-11.TCK_5 JTAG_10-11.TDI_5 JTAG_10-11.TMS_5
net class JTAG_11-12: JTAG_00-01.TDO_5 JTAG_10-11.TCK_5 JTAG_10-11.TMS_5 JTAG_11-12.TDI_5
net class JTAG_12-13: JTAG_00-01.TDO_5 JTAG_10-11.TCK_5 JTAG_10-11.TMS_5 JTAG_12-13.TDI_5
net class JTAG_13-BUF: JTAG_00-01.TDO_5 JTAG_10-11.TCK_5 JTAG_10-11.TMS_5 JTAG_13-BUF.TDI_5
net class JTAG_20-21: JTAG_00-01.TDO_5 JTAG_20-21.TCK_5 JTAG_20-21.TDI_5 JTAG_20-21.TMS_5
net class JTAG_21-22: JTAG_00-01.TDO_5 JTAG_20-21.TCK_5 JTAG_20-21.TMS_5 JTAG_21-22.TDI_5
net class JTAG_22-23: JTAG_00-01.TDO_5 JTAG_20-21.TCK_5 JTAG_20-21.TMS_5 JTAG_22-23.TDI_5
net class JTAG_23-BUF: JTAG_00-01.TDO_5 JTAG_20-21.TCK_5 JTAG_20-21.TMS_5 JTAG_23-BUF.TDI_5
net class JTAG_30-31: JTAG_00-01.TDO_5 JTAG_30-31.TCK_5 JTAG_30-31.TDI_5 JTAG_30-31.TMS_5
net class JTAG_31-32: JTAG_00-01.TDO_5 JTAG_30-31.TCK_5 JTAG_30-31.TMS_5 JTAG_31-32.TDI_5
net class JTAG_32-33: JTAG_00-01.TDO_5 JTAG_30-31.TCK_5 JTAG_30-31.TMS_5 JTAG_32-33.TDI_5
net class JTAG_BUF-00: JTAG_00-01.TCK_5 JTAG_00-01.TDO_5 JTAG_00-01.TMS_5 JTAG_BUF-00.TDI_5
net class JTAG_BUF-10: JTAG_00-01.TDO_5 JTAG_03-BUF.TDI_5 JTAG_10-11.TCK_5 JTAG_10-11.TMS_5
net class JTAG_BUF-20: JTAG_00-01.TDO_5 JTAG_13-BUF.TDI_5 JTAG_20-21.TCK_5 JTAG_20-21.TMS_5
net class JTAG_BUF-30: JTAG_00-01.TDO_5 JTAG_23-BUF.TDI_5 JTAG_30-31.TCK_5 JTAG_30-31.TMS_5
net class JTAG_CFG-BUF: JTAG_00-01.TDO_5 JTAG_BUF-00.TDI_5 JTAG_CFG-BUF.TCK_5 JTAG_CFG-BUF.TMS_5
net class JTAGI: JTAG_00-01.TDO_5 JTAG_CFG-BUF.TCK_5 JTAG_CFG-BUF.TMS_5 JTAGI.TDI_5
net class JTAGO: JTAG_00-01.TDO_5 JTAG_30-31.TCK_5 JTAG_30-31.TMS_5 JTAGO.TDI_5
net class L00: L00.D0_5 L00.D1_5 L00.D2_5 L00.D3_5 L00.D4_5 L00.D5_5 L00.D6_5 L00.D7_5 L00.D8_5 L00.D9_5 L00.D10_5 L00.D11_5 L00.D12_5 L00.D13_5 L00.D14_5 L00.D15_5 L00.L_5_N L00.L_5_P L00.LDM_5 L00.U_5_N L00.U_5_P L00.UDM_5
net class L01: L01.D0_5 L01.D1_5 L01.D2_5 L01.D3_5 L01.D4_5 L01.D5_5 L01.D6_5 L01.D7_5 L01.D8_5 L01.D9_5 L01.D10_5 L01.D11_5 L01.D12_5 L01.D13_5 L01.D14_5 L01.D15_5 L01.L_5_N L01.L_5_P L01.LDM_5 L01.U_5_N L01.U_5_P L01.UDM_5
net class L02: L02.D0_5 L02.D1_5 L02.D2_5 L02.D3_5 L02.D4_5 L02.D5_5 L02.D6_5 L02.D7_5 L02.D8_5 L02.D9_5 L02.D10_5 L02.D11_5 L02.D12_5 L02.D13_5 L02.D14_5 L02.D15_5 L02.L_5_N L02.L_5_P L02.LDM_5 L02.U_5_N L02.U_5_P L02.UDM_5
net class L03: L03.D0_5 L03.D1_5 L03.D2_5 L03.D3_5 L03.D4_5 L03.D5_5 L03.D6_5 L03.D7_5 L03.D8_5 L03.D9_5 L03.D10_5 L03.D11_5 L03.D12_5 L03.D13_5 L03.D14_5 L03.D15_5 L03.L_5_N L03.L_5_P L03.LDM_5 L03.U_5_N L03.U_5_P L03.UDM_5
net class L30: L30.D0_5 L30.D1_5 L30.D2_5 L30.D3_5 L30.D4_5 L30.D5_5 L30.D6_5 L30.D7_5 L30.D8_5 L30.D9_5 L30.D10_5 L30.D11_5 L30.D12_5 L30.D13_5 L30.D14_5 L30.D15_5 L30.L_5_N L30.L_5_P L30.LDM_5 L30.U_5_N L30.U_5_P L30.UDM_5
net class L31: L31.D0_5 L31.D1_5 L31.D2_5 L31.D3_5 L31.D4_5 L31.D5_5 L31.D6_5 L31.D7_5 L31.D8_5 L31.D9_5 L31.D10_5 L31.D11_5 L31.D12_5 L31.D13_5 L31.D14_5 L31.D15_5 L31.L_5_N L31.L_5_P L31.LDM_5 L31.U_5_N L31.U_5_P L31.UDM_5
net class L32: L32.D0_5 L32.D1_5 L32.D2_5 L32.D3_5 L32.D4_5 L32.D5_5 L32.D6_5 L32.D7_5 L32.D8_5 L32.D9_5 L32.D10_5 L32.D11_5 L32.D12_5 L32.D13_5 L32.D14_5 L32.D15_5 L32.L_5_N L32.L_5_P L32.LDM_5 L32.U_5_N L32.U_5_P L32.UDM_5
net class L33: L33.D0_5 L33.D1_5 L33.D2_5 L33.D3_5 L33.D4_5 L33.D5_5 L33.D6_5 L33.D7_5 L33.D8_5 L33.D9_5 L33.D10_5 L33.D11_5 L33.D12_5 L33.D13_5 L33.D14_5 L33.D15_5 L33.L_5_N L33.L_5_P L33.LDM_5 L33.U_5_N L33.U_5_P L33.UDM_5
net class MCLK: MCLK.C_5_N MCLK.C_5_P
net class NOSWAP: CLK00.C_5_N CLK00.C_5_P CLK01.C_5_N CLK01.C_5_P CLK02.C_5_N CLK02.C_5_P CLK03.C_5_N CLK03.C_5_P CLK30.C_5_N CLK30.C_5_P CLK31.C_5_N CLK31.C_5_P CLK32.C_5_N CLK32.C_5_P CLK33.C_5_N CLK33.C_5_P GPMCO.S0_5 IL07_00-J3A.DDRCC.S01C_5_N IL07_00-J3A.DDRCC.S01C_5_P IL07_00-J3A.SDRCC.GPIO15.D01C_5_N IL07_00-J3A.SDRCC.GPIO15.D01C_5_P IL12_00-07_01.DDRCC.S01C_5_N IL12_00-07_01.DDRCC.S01C_5_P IL12_00-07_01.SDRCC.GPIO15.D01C_5_N IL12_00-07_01.SDRCC.GPIO15.D01C_5_P IL12_01-07_02.DDRCC.S01C_5_N IL12_01-07_02.DDRCC.S01C_5_P IL12_01-07_02.SDRCC.GPIO15.D01C_5_N IL12_01-07_02.SDRCC.GPIO15.D01C_5_P IL12_02-07_03.DDRCC.S01C_5_N IL12_02-07_03.DDRCC.S01C_5_P IL12_02-07_03.SDRCC.GPIO15.D01C_5_N IL12_02-07_03.SDRCC.GPIO15.D01C_5_P IL12_03-J2B.DDRCC.S01C_5_N IL12_03-J2B.DDRCC.S01C_5_P IL12_03-J2B.SDRCC.GPIO15.D01C_5_N IL12_03-J2B.SDRCC.GPIO15.D01C_5_P IL12_10-68_11.DDRCC.S01C_5_N IL12_10-68_11.DDRCC.S01C_5_P IL12_10-68_11.SDRCC.GPIO15.D01C_5_N IL12_10-68_11.SDRCC.GPIO15.D01C_5_P IL12_11-68_12.DDRCC.S01C_5_N IL12_11-68_12.DDRCC.S01C_5_P IL12_11-68_12.SDRCC.GPIO15.D01C_5_N IL12_11-68_12.SDRCC.GPIO15.D01C_5_P IL12_12-68_13.DDRCC.S01C_5_N IL12_12-68_13.DDRCC.S01C_5_P IL12_12-68_13.SDRCC.GPIO15.D01C_5_N IL12_12-68_13.SDRCC.GPIO15.D01C_5_P IL12_13-J2A.DDRCC.S01C_5_N IL12_13-J2A.DDRCC.S01C_5_P IL12_13-J2A.SDRCC.GPIO15.D01C_5_N IL12_13-J2A.SDRCC.GPIO15.D01C_5_P IL12_20-68_21.DDRCC.S01C_5_N IL12_20-68_21.DDRCC.S01C_5_P IL12_20-68_21.SDRCC.GPIO15.D01C_5_N IL12_20-68_21.SDRCC.GPIO15.D01C_5_P IL12_21-68_22.DDRCC.S01C_5_N IL12_21-68_22.DDRCC.S01C_5_P IL12_21-68_22.SDRCC.GPIO15.D01C_5_N IL12_21-68_22.SDRCC.GPIO15.D01C_5_P IL12_22-68_23.DDRCC.S01C_5_N IL12_22-68_23.DDRCC.S01C_5_P IL12_22-68_23.SDRCC.GPIO15.D01C_5_N IL12_22-68_23.SDRCC.GPIO15.D01C_5_P IL12_23-J1B.DDRCC.S01C_5_N IL12_23-J1B.DDRCC.S01C_5_P IL12_23-J1B.SDRCC.GPIO15.D01C_5_N IL12_23-J1B.SDRCC.GPIO15.D01C_5_P IL12_30-68_31.DDRCC.S01C_5_N IL12_30-68_31.DDRCC.S01C_5_P IL12_30-68_31.SDRCC.GPIO15.D01C_5_N IL12_30-68_31.SDRCC.GPIO15.D01C_5_P IL12_31-68_32.DDRCC.S01C_5_N IL12_31-68_32.DDRCC.S01C_5_P IL12_31-68_32.SDRCC.GPIO15.D01C_5_N IL12_31-68_32.SDRCC.GPIO15.D01C_5_P IL12_32-68_33.DDRCC.S01C_5_N IL12_32-68_33.DDRCC.S01C_5_P IL12_32-68_33.SDRCC.GPIO15.D01C_5_N IL12_32-68_33.SDRCC.GPIO15.D01C_5_P IL12_33-J1A.DDRCC.S01C_5_N IL12_33-J1A.DDRCC.S01C_5_P IL12_33-J1A.SDRCC.GPIO15.D01C_5_N IL12_33-J1A.SDRCC.GPIO15.D01C_5_P IL34_10-07_20.DDRCC.S01C_5_N IL34_10-07_20.DDRCC.S01C_5_P IL34_10-07_20.SDRCC.GPIO15.D01C_5_N IL34_10-07_20.SDRCC.GPIO15.D01C_5_P IL34_11-07_21.DDRCC.S01C_5_N IL34_11-07_21.DDRCC.S01C_5_P IL34_11-07_21.SDRCC.GPIO15.D01C_5_N IL34_11-07_21.SDRCC.GPIO15.D01C_5_P IL34_12-07_22.DDRCC.S01C_5_N IL34_12-07_22.DDRCC.S01C_5_P IL34_12-07_22.SDRCC.GPIO15.D01C_5_N IL34_12-07_22.SDRCC.GPIO15.D01C_5_P IL34_13-07_23.DDRCC.S01C_5_N IL34_13-07_23.DDRCC.S01C_5_P IL34_13-07_23.SDRCC.GPIO15.D01C_5_N IL34_13-07_23.SDRCC.GPIO15.D01C_5_P IL34_20-07_30.DDRCC.S01C_5_N IL34_20-07_30.DDRCC.S01C_5_P IL34_20-07_30.SDRCC.GPIO15.D01C_5_N IL34_20-07_30.SDRCC.GPIO15.D01C_5_P IL34_21-07_31.DDRCC.S01C_5_N IL34_21-07_31.DDRCC.S01C_5_P IL34_21-07_31.SDRCC.GPIO15.D01C_5_N IL34_21-07_31.SDRCC.GPIO15.D01C_5_P IL34_22-07_32.DDRCC.S01C_5_N IL34_22-07_32.DDRCC.S01C_5_P IL34_22-07_32.SDRCC.GPIO15.D01C_5_N IL34_22-07_32.SDRCC.GPIO15.D01C_5_P IL34_23-07_33.DDRCC.S01C_5_N IL34_23-07_33.DDRCC.S01C_5_P IL34_23-07_33.SDRCC.GPIO15.D01C_5_N IL34_23-07_33.SDRCC.GPIO15.D01C_5_P IL68_00-07_10.DDRCC.S01C_5_N IL68_00-07_10.DDRCC.S01C_5_P IL68_00-07_10.SDRCC.GPIO15.D01C_5_N IL68_00-07_10.SDRCC.GPIO15.D01C_5_P IL68_01-07_11.DDRCC.S01C_5_N IL68_01-07_11.DDRCC.S01C_5_P IL68_01-07_11.SDRCC.GPIO15.D01C_5_N IL68_01-07_11.SDRCC.GPIO15.D01C_5_P IL68_02-07_12.DDRCC.S01C_5_N IL68_02-07_12.DDRCC.S01C_5_P IL68_02-07_12.SDRCC.GPIO15.D01C_5_N IL68_02-07_12.SDRCC.GPIO15.D01C_5_P IL68_03-07_13.DDRCC.S01C_5_N IL68_03-07_13.DDRCC.S01C_5_P IL68_03-07_13.SDRCC.GPIO15.D01C_5_N IL68_03-07_13.SDRCC.GPIO15.D01C_5_P IL68_10-J3B.DDRCC.S01C_5_N IL68_10-J3B.DDRCC.S01C_5_P IL68_10-J3B.SDRCC.GPIO15.D01C_5_N IL68_10-J3B.SDRCC.GPIO15.D01C_5_P IL68_20-J4A.DDRCC.S01C_5_N IL68_20-J4A.DDRCC.S01C_5_P IL68_20-J4A.SDRCC.GPIO15.D01C_5_N IL68_20-J4A.SDRCC.GPIO15.D01C_5_P IL68_30-J4B.DDRCC.S01C_5_N IL68_30-J4B.DDRCC.S01C_5_P IL68_30-J4B.SDRCC.GPIO15.D01C_5_N IL68_30-J4B.SDRCC.GPIO15.D01C_5_P L00.L_5_N L00.L_5_P L00.U_5_N L00.U_5_P L01.L_5_N L01.L_5_P L01.U_5_N L01.U_5_P L02.L_5_N L02.L_5_P L02.U_5_N L02.U_5_P L03.L_5_N L03.L_5_P L03.U_5_N L03.U_5_P L30.L_5_N L30.L_5_P L30.U_5_N L30.U_5_P L31.L_5_N L31.L_5_P L31.U_5_N L31.U_5_P L32.L_5_N L32.L_5_P L32.U_5_N L32.U_5_P L33.L_5_N L33.L_5_P L33.U_5_N L33.U_5_P U00.L_5_N U00.L_5_P U00.U_5_N U00.U_5_P U01.L_5_N U01.L_5_P U01.U_5_N U01.U_5_P U02.L_5_N U02.L_5_P U02.U_5_N U02.U_5_P U03.L_5_N U03.L_5_P U03.U_5_N U03.U_5_P U30.L_5_N U30.L_5_P U30.U_5_N U30.U_5_P U31.L_5_N U31.L_5_P U31.U_5_N U31.U_5_P U32.L_5_N U32.L_5_P U32.U_5_N U32.U_5_P U33.L_5_N U33.L_5_P U33.U_5_N U33.U_5_P
net class RSTO: RST00_5_N RST01_5_N RST02_5_N RST03_5_N RST10_5_N RST11_5_N RST12_5_N RST13_5_N RST20_5_N RST21_5_N RST22_5_N RST23_5_N RST30_5_N RST31_5_N RST32_5_N RST33_5_N RSTO.RST16_5
net class SCLK: SCLK.C_5_N SCLK.C_5_P
net class U00: U00.D0_5 U00.D1_5 U00.D2_5 U00.D3_5 U00.D4_5 U00.D5_5 U00.D6_5 U00.D7_5 U00.D8_5 U00.D9_5 U00.D10_5 U00.D11_5 U00.D12_5 U00.D13_5 U00.D14_5 U00.D15_5 U00.L_5_N U00.L_5_P U00.LDM_5 U00.U_5_N U00.U_5_P U00.UDM_5
net class U01: U01.D0_5 U01.D1_5 U01.D2_5 U01.D3_5 U01.D4_5 U01.D5_5 U01.D6_5 U01.D7_5 U01.D8_5 U01.D9_5 U01.D10_5 U01.D11_5 U01.D12_5 U01.D13_5 U01.D14_5 U01.D15_5 U01.L_5_N U01.L_5_P U01.LDM_5 U01.U_5_N U01.U_5_P U01.UDM_5
net class U02: U02.D0_5 U02.D1_5 U02.D2_5 U02.D3_5 U02.D4_5 U02.D5_5 U02.D6_5 U02.D7_5 U02.D8_5 U02.D9_5 U02.D10_5 U02.D11_5 U02.D12_5 U02.D13_5 U02.D14_5 U02.D15_5 U02.L_5_N U02.L_5_P U02.LDM_5 U02.U_5_N U02.U_5_P U02.UDM_5
net class U03: U03.D0_5 U03.D1_5 U03.D2_5 U03.D3_5 U03.D4_5 U03.D5_5 U03.D6_5 U03.D7_5 U03.D8_5 U03.D9_5 U03.D10_5 U03.D11_5 U03.D12_5 U03.D13_5 U03.D14_5 U03.D15_5 U03.L_5_N U03.L_5_P U03.LDM_5 U03.U_5_N U03.U_5_P U03.UDM_5
net class U30: U30.D0_5 U30.D1_5 U30.D2_5 U30.D3_5 U30.D4_5 U30.D5_5 U30.D6_5 U30.D7_5 U30.D8_5 U30.D9_5 U30.D10_5 U30.D11_5 U30.D12_5 U30.D13_5 U30.D14_5 U30.D15_5 U30.L_5_N U30.L_5_P U30.LDM_5 U30.U_5_N U30.U_5_P U30.UDM_5
net class U31: U31.D0_5 U31.D1_5 U31.D2_5 U31.D3_5 U31.D4_5 U31.D5_5 U31.D6_5 U31.D7_5 U31.D8_5 U31.D9_5 U31.D10_5 U31.D11_5 U31.D12_5 U31.D13_5 U31.D14_5 U31.D15_5 U31.L_5_N U31.L_5_P U31.LDM_5 U31.U_5_N U31.U_5_P U31.UDM_5
net class U32: U32.D0_5 U32.D1_5 U32.D2_5 U32.D3_5 U32.D4_5 U32.D5_5 U32.D6_5 U32.D7_5 U32.D8_5 U32.D9_5 U32.D10_5 U32.D11_5 U32.D12_5 U32.D13_5 U32.D14_5 U32.D15_5 U32.L_5_N U32.L_5_P U32.LDM_5 U32.U_5_N U32.U_5_P U32.UDM_5
net class U33: U33.D0_5 U33.D1_5 U33.D2_5 U33.D3_5 U33.D4_5 U33.D5_5 U33.D6_5 U33.D7_5 U33.D8_5 U33.D9_5 U33.D10_5 U33.D11_5 U33.D12_5 U33.D13_5 U33.D14_5 U33.D15_5 U33.L_5_N U33.L_5_P U33.LDM_5 U33.U_5_N U33.U_5_P U33.UDM_5
channel class fpga-power: FPGAPWR1 FPGAPWR2 FPGAPWR3 FPGAPWR4 FPGAPWR5 FPGAPWR6 FPGAPWR7 FPGAPWR8 FPGAPWR9 FPGAPWR10 FPGAPWR11 FPGAPWR12 FPGAPWR13 FPGAPWR14 FPGAPWR15 FPGAPWR16
channel class jtag-buffer: JTAGBUF0 JTAGBUF1 JTAGBUF2 JTAGBUF3
channel class LED8: ARRAYLEDS FPGA00-LEDs1 FPGA00-LEDs2 FPGA00-LEDs3 FPGA00-LEDs4 FPGA00-LEDs5 FPGA00-LEDs6 FPGA00-LEDs7 FPGA00-LEDs8 FPGA10-LEDs1 FPGA10-LEDs2 FPGA10-LEDs3 FPGA10-LEDs4 FPGA10-LEDs5 FPGA10-LEDs6 FPGA10-LEDs7 FPGA10-LEDs8
channel class sdram: SDRAM00L SDRAM00U SDRAM01L SDRAM01U SDRAM02L SDRAM02U SDRAM03L SDRAM03U SDRAM30L SDRAM30U SDRAM31L SDRAM31U SDRAM32L SDRAM32U SDRAM33L SDRAM33U
differential pair U33.U_5: +U33.U_5_P -U33.U_5_N
differential pair U33.L_5: +U33.L_5_P -U33.L_5_N
differential pair U32.U_5: +U32.U_5_P -U32.U_5_N
differential pair U32.L_5: +U32.L_5_P -U32.L_5_N
differential pair U31.U_5: +U31.U_5_P -U31.U_5_N
differential pair U31.L_5: +U31.L_5_P -U31.L_5_N
differential pair U30.U_5: +U30.U_5_P -U30.U_5_N
differential pair U30.L_5: +U30.L_5_P -U30.L_5_N
differential pair U03.U_5: +U03.U_5_P -U03.U_5_N
differential pair U03.L_5: +U03.L_5_P -U03.L_5_N
differential pair U02.U_5: +U02.U_5_P -U02.U_5_N
differential pair U02.L_5: +U02.L_5_P -U02.L_5_N
differential pair U01.U_5: +U01.U_5_P -U01.U_5_N
differential pair U01.L_5: +U01.L_5_P -U01.L_5_N
differential pair U00.U_5: +U00.U_5_P -U00.U_5_N
differential pair U00.L_5: +U00.L_5_P -U00.L_5_N
differential pair OBCLK_17: +OBCLK_17_P -OBCLK_17_N
differential pair L33.U_5: +L33.U_5_P -L33.U_5_N
differential pair L33.L_5: +L33.L_5_P -L33.L_5_N
differential pair L32.U_5: +L32.U_5_P -L32.U_5_N
differential pair L32.L_5: +L32.L_5_P -L32.L_5_N
differential pair L31.U_5: +L31.U_5_P -L31.U_5_N
differential pair L31.L_5: +L31.L_5_P -L31.L_5_N
differential pair L30.U_5: +L30.U_5_P -L30.U_5_N
differential pair L30.L_5: +L30.L_5_P -L30.L_5_N
differential pair L03.U_5: +L03.U_5_P -L03.U_5_N
differential pair L03.L_5: +L03.L_5_P -L03.L_5_N
differential pair L02.U_5: +L02.U_5_P -L02.U_5_N
differential pair L02.L_5: +L02.L_5_P -L02.L_5_N
differential pair L01.U_5: +L01.U_5_P -L01.U_5_N
differential pair L01.L_5: +L01.L_5_P -L01.L_5_N
differential pair L00.U_5: +L00.U_5_P -L00.U_5_N
differential pair L00.L_5: +L00.L_5_P -L00.L_5_N
differential pair IL68_03-07_13.SDRCC.GPIO15.D01C_5: +IL68_03-07_13.SDRCC.GPIO15.D01C_5_P -IL68_03-07_13.SDRCC.GPIO15.D01C_5_N
differential pair IL68_02-07_12.SDRCC.GPIO15.D01C_5: +IL68_02-07_12.SDRCC.GPIO15.D01C_5_P -IL68_02-07_12.SDRCC.GPIO15.D01C_5_N
differential pair IL68_01-07_11.SDRCC.GPIO15.D01C_5: +IL68_01-07_11.SDRCC.GPIO15.D01C_5_P -IL68_01-07_11.SDRCC.GPIO15.D01C_5_N
differential pair IL68_00-07_10.SDRCC.GPIO15.D01C_5: +IL68_00-07_10.SDRCC.GPIO15.D01C_5_P -IL68_00-07_10.SDRCC.GPIO15.D01C_5_N
differential pair IL34_23-07_33.SDRCC.GPIO15.D01C_5: +IL34_23-07_33.SDRCC.GPIO15.D01C_5_P -IL34_23-07_33.SDRCC.GPIO15.D01C_5_N
differential pair IL34_22-07_32.SDRCC.GPIO15.D01C_5: +IL34_22-07_32.SDRCC.GPIO15.D01C_5_P -IL34_22-07_32.SDRCC.GPIO15.D01C_5_N
differential pair IL34_21-07_31.SDRCC.GPIO15.D01C_5: +IL34_21-07_31.SDRCC.GPIO15.D01C_5_P -IL34_21-07_31.SDRCC.GPIO15.D01C_5_N
differential pair IL34_20-07_30.SDRCC.GPIO15.D01C_5: +IL34_20-07_30.SDRCC.GPIO15.D01C_5_P -IL34_20-07_30.SDRCC.GPIO15.D01C_5_N
differential pair IL34_13-07_23.SDRCC.GPIO15.D01C_5: +IL34_13-07_23.SDRCC.GPIO15.D01C_5_P -IL34_13-07_23.SDRCC.GPIO15.D01C_5_N
differential pair IL34_12-07_22.SDRCC.GPIO15.D01C_5: +IL34_12-07_22.SDRCC.GPIO15.D01C_5_P -IL34_12-07_22.SDRCC.GPIO15.D01C_5_N
differential pair IL34_11-07_21.SDRCC.GPIO15.D01C_5: +IL34_11-07_21.SDRCC.GPIO15.D01C_5_P -IL34_11-07_21.SDRCC.GPIO15.D01C_5_N
differential pair IL34_10-07_20.SDRCC.GPIO15.D01C_5: +IL34_10-07_20.SDRCC.GPIO15.D01C_5_P -IL34_10-07_20.SDRCC.GPIO15.D01C_5_N
differential pair IL12_33-J1A.SDRCC.GPIO15.D01C_5: +IL12_33-J1A.SDRCC.GPIO15.D01C_5_P -IL12_33-J1A.SDRCC.GPIO15.D01C_5_N
differential pair IL12_33-J1A.DDRCC.S01C_5: +IL12_33-J1A.DDRCC.S01C_5_P -IL12_33-J1A.DDRCC.S01C_5_N
differential pair IL12_32-68_33.SDRCC.GPIO15.D01C_5: +IL12_32-68_33.SDRCC.GPIO15.D01C_5_P -IL12_32-68_33.SDRCC.GPIO15.D01C_5_N
differential pair IL12_32-68_33.DDRCC.S01C_5: +IL12_32-68_33.DDRCC.S01C_5_P -IL12_32-68_33.DDRCC.S01C_5_N
differential pair IL12_31-68_32.SDRCC.GPIO15.D01C_5: +IL12_31-68_32.SDRCC.GPIO15.D01C_5_P -IL12_31-68_32.SDRCC.GPIO15.D01C_5_N
differential pair IL12_31-68_32.DDRCC.S01C_5: +IL12_31-68_32.DDRCC.S01C_5_P -IL12_31-68_32.DDRCC.S01C_5_N
differential pair IL12_30-68_31.SDRCC.GPIO15.D01C_5: +IL12_30-68_31.SDRCC.GPIO15.D01C_5_P -IL12_30-68_31.SDRCC.GPIO15.D01C_5_N
differential pair IL12_30-68_31.DDRCC.S01C_5: +IL12_30-68_31.DDRCC.S01C_5_P -IL12_30-68_31.DDRCC.S01C_5_N
differential pair IL12_23-J1B.SDRCC.GPIO15.D01C_5: +IL12_23-J1B.SDRCC.GPIO15.D01C_5_P -IL12_23-J1B.SDRCC.GPIO15.D01C_5_N
differential pair IL12_23-J1B.DDRCC.S01C_5: +IL12_23-J1B.DDRCC.S01C_5_P -IL12_23-J1B.DDRCC.S01C_5_N
differential pair IL12_22-68_23.SDRCC.GPIO15.D01C_5: +IL12_22-68_23.SDRCC.GPIO15.D01C_5_P -IL12_22-68_23.SDRCC.GPIO15.D01C_5_N
differential pair IL12_22-68_23.DDRCC.S01C_5: +IL12_22-68_23.DDRCC.S01C_5_P -IL12_22-68_23.DDRCC.S01C_5_N
differential pair IL12_21-68_22.SDRCC.GPIO15.D01C_5: +IL12_21-68_22.SDRCC.GPIO15.D01C_5_P -IL12_21-68_22.SDRCC.GPIO15.D01C_5_N
differential pair IL12_21-68_22.DDRCC.S01C_5: +IL12_21-68_22.DDRCC.S01C_5_P -IL12_21-68_22.DDRCC.S01C_5_N
differential pair IL12_20-68_21.SDRCC.GPIO15.D01C_5: +IL12_20-68_21.SDRCC.GPIO15.D01C_5_P -IL12_20-68_21.SDRCC.GPIO15.D01C_5_N
differential pair IL12_20-68_21.DDRCC.S01C_5: +IL12_20-68_21.DDRCC.S01C_5_P -IL12_20-68_21.DDRCC.S01C_5_N
differential pair IL12_13-J2A.SDRCC.GPIO15.D01C_5: +IL12_13-J2A.SDRCC.GPIO15.D01C_5_P -IL12_13-J2A.SDRCC.GPIO15.D01C_5_N
differential pair IL12_13-J2A.DDRCC.S01C_5: +IL12_13-J2A.DDRCC.S01C_5_P -IL12_13-J2A.DDRCC.S01C_5_N
differential pair IL12_12-68_13.SDRCC.GPIO15.D01C_5: +IL12_12-68_13.SDRCC.GPIO15.D01C_5_P -IL12_12-68_13.SDRCC.GPIO15.D01C_5_N
differential pair IL12_12-68_13.DDRCC.S01C_5: +IL12_12-68_13.DDRCC.S01C_5_P -IL12_12-68_13.DDRCC.S01C_5_N
differential pair IL12_11-68_12.SDRCC.GPIO15.D01C_5: +IL12_11-68_12.SDRCC.GPIO15.D01C_5_P -IL12_11-68_12.SDRCC.GPIO15.D01C_5_N
differential pair IL12_11-68_12.DDRCC.S01C_5: +IL12_11-68_12.DDRCC.S01C_5_P -IL12_11-68_12.DDRCC.S01C_5_N
differential pair IL12_10-68_11.SDRCC.GPIO15.D01C_5: +IL12_10-68_11.SDRCC.GPIO15.D01C_5_P -IL12_10-68_11.SDRCC.GPIO15.D01C_5_N
differential pair IL12_10-68_11.DDRCC.S01C_5: +IL12_10-68_11.DDRCC.S01C_5_P -IL12_10-68_11.DDRCC.S01C_5_N
differential pair IL12_03-J2B.SDRCC.GPIO15.D01C_5: +IL12_03-J2B.SDRCC.GPIO15.D01C_5_P -IL12_03-J2B.SDRCC.GPIO15.D01C_5_N
differential pair IL12_03-J2B.DDRCC.S01C_5: +IL12_03-J2B.DDRCC.S01C_5_P -IL12_03-J2B.DDRCC.S01C_5_N
differential pair IL12_02-07_03.SDRCC.GPIO15.D01C_5: +IL12_02-07_03.SDRCC.GPIO15.D01C_5_P -IL12_02-07_03.SDRCC.GPIO15.D01C_5_N
differential pair IL12_02-07_03.DDRCC.S01C_5: +IL12_02-07_03.DDRCC.S01C_5_P -IL12_02-07_03.DDRCC.S01C_5_N
differential pair IL12_01-07_02.SDRCC.GPIO15.D01C_5: +IL12_01-07_02.SDRCC.GPIO15.D01C_5_P -IL12_01-07_02.SDRCC.GPIO15.D01C_5_N
differential pair IL12_01-07_02.DDRCC.S01C_5: +IL12_01-07_02.DDRCC.S01C_5_P -IL12_01-07_02.DDRCC.S01C_5_N
differential pair IL12_00-07_01.SDRCC.GPIO15.D01C_5: +IL12_00-07_01.SDRCC.GPIO15.D01C_5_P -IL12_00-07_01.SDRCC.GPIO15.D01C_5_N
differential pair IL12_00-07_01.DDRCC.S01C_5: +IL12_00-07_01.DDRCC.S01C_5_P -IL12_00-07_01.DDRCC.S01C_5_N
differential pair IL07_00-J3A.SDRCC.GPIO15.D01C_5: +IL07_00-J3A.SDRCC.GPIO15.D01C_5_P -IL07_00-J3A.SDRCC.GPIO15.D01C_5_N
differential pair CB.OBCLK_17: +CB.OBCLK_17_P -CB.OBCLK_17_N
differential pair CB.MCLK.C_17: +CB.MCLK.C_17_P -CB.MCLK.C_17_N

## Components (designator, comment, footprint, x,y, rotation, side; value= is the part's Value field where it differs from the comment)
J1 "SEAF-40-06.5-S-10-2-A-K-TR" SEAF-40-06.5-S-10-2-A-K-TR 60,20 r180 bottom
J2 "SEAF-40-06.5-S-10-2-A-K-TR" SEAF-40-06.5-S-10-2-A-K-TR 140,20 r180 bottom
J3 "SEAM-40-11.0-S-10-2-A-K-TR" SEAM-40-11.0-S-10-2-A-K-TR 60,20 r180 top locked
J4 "SEAM-40-11.0-S-10-2-A-K-TR" SEAM-40-11.0-S-10-2-A-K-TR 140,20 r180 top locked
M1 "MOUNT" MOUNTM3 5,12.5 r0 top
M2 "MOUNT" MOUNTM3 5,37.5 r0 top
M3 "MOUNT" MOUNTM3 5,62.5 r0 top
M4 "MOUNT" MOUNTM3 5,87.5 r0 top
M5 "MOUNT" MOUNTM3 5,112.5 r0 top
M6 "MOUNT" MOUNTM3 5,137.5 r0 top
M7 "MOUNT" MOUNTM3 5,162.5 r0 top
M8 "MOUNT" MOUNTM3 5,187.5 r0 top
M9 "MOUNT" MOUNTM3 12.5,5 r0 top
M10 "MOUNT" MOUNTM3 37.5,5 r0 top
M11 "MOUNT" MOUNTM3 62.5,5 r0 top
M12 "MOUNT" MOUNTM3 87.5,5 r0 top
M13 "MOUNT" MOUNTM3 112.5,5 r0 top
M14 "MOUNT" MOUNTM3 137.5,5 r0 top
M15 "MOUNT" MOUNTM3 162.5,5 r0 top
M16 "MOUNT" MOUNTM3 187.5,5 r0 top
M17 "MOUNT" MOUNTM3 195,12.5 r90 top
M18 "MOUNT" MOUNTM3 195,37.5 r90 top
M19 "MOUNT" MOUNTM3 195,62.5 r90 top
M20 "MOUNT" MOUNTM3 195,87.5 r90 top
M21 "MOUNT" MOUNTM3 195,112.5 r90 top
M22 "MOUNT" MOUNTM3 195,137.5 r90 top
M23 "MOUNT" MOUNTM3 195,162.5 r90 top
M24 "MOUNT" MOUNTM3 195,187.5 r90 top
M25 "MOUNT" MOUNTM3 187.5,195 r180 top
M26 "MOUNT" MOUNTM3 162.5,195 r180 top
M27 "MOUNT" MOUNTM3 137.5,195 r180 top
M28 "MOUNT" MOUNTM3 112.5,195 r180 top
M29 "MOUNT" MOUNTM3 87.5,195 r180 top
M30 "MOUNT" MOUNTM3 62.5,195 r180 top
M31 "MOUNT" MOUNTM3 37.5,195 r180 top
M32 "MOUNT" MOUNTM3 12.5,195 r180 top